# Altium PCB altium.pcbdoc
Units mil, origin at the board's own origin, x right, y up, seen from the top; angles counter-clockwise.
Board outline 2959 x 1843.93 mil, 2 copper layers (Top Layer, Bottom Layer); 9 components, 14 nets, 31 pads, 0 vias.
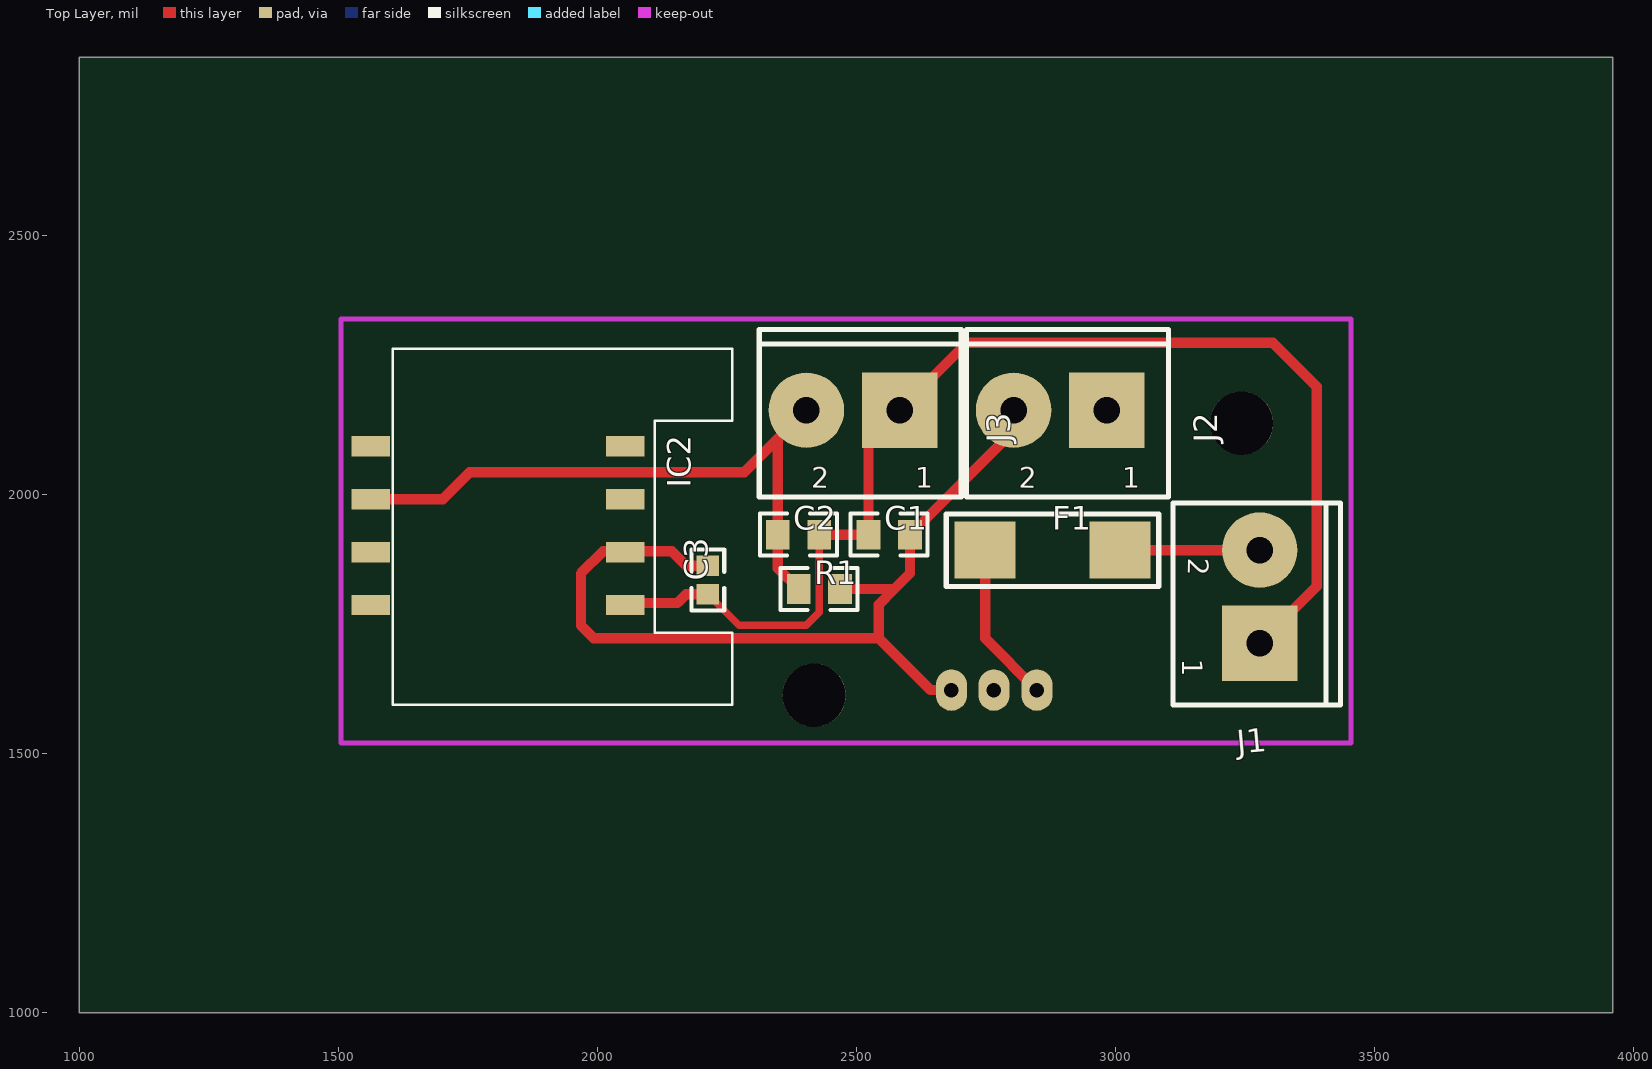
[diagram p0: Top Layer view]
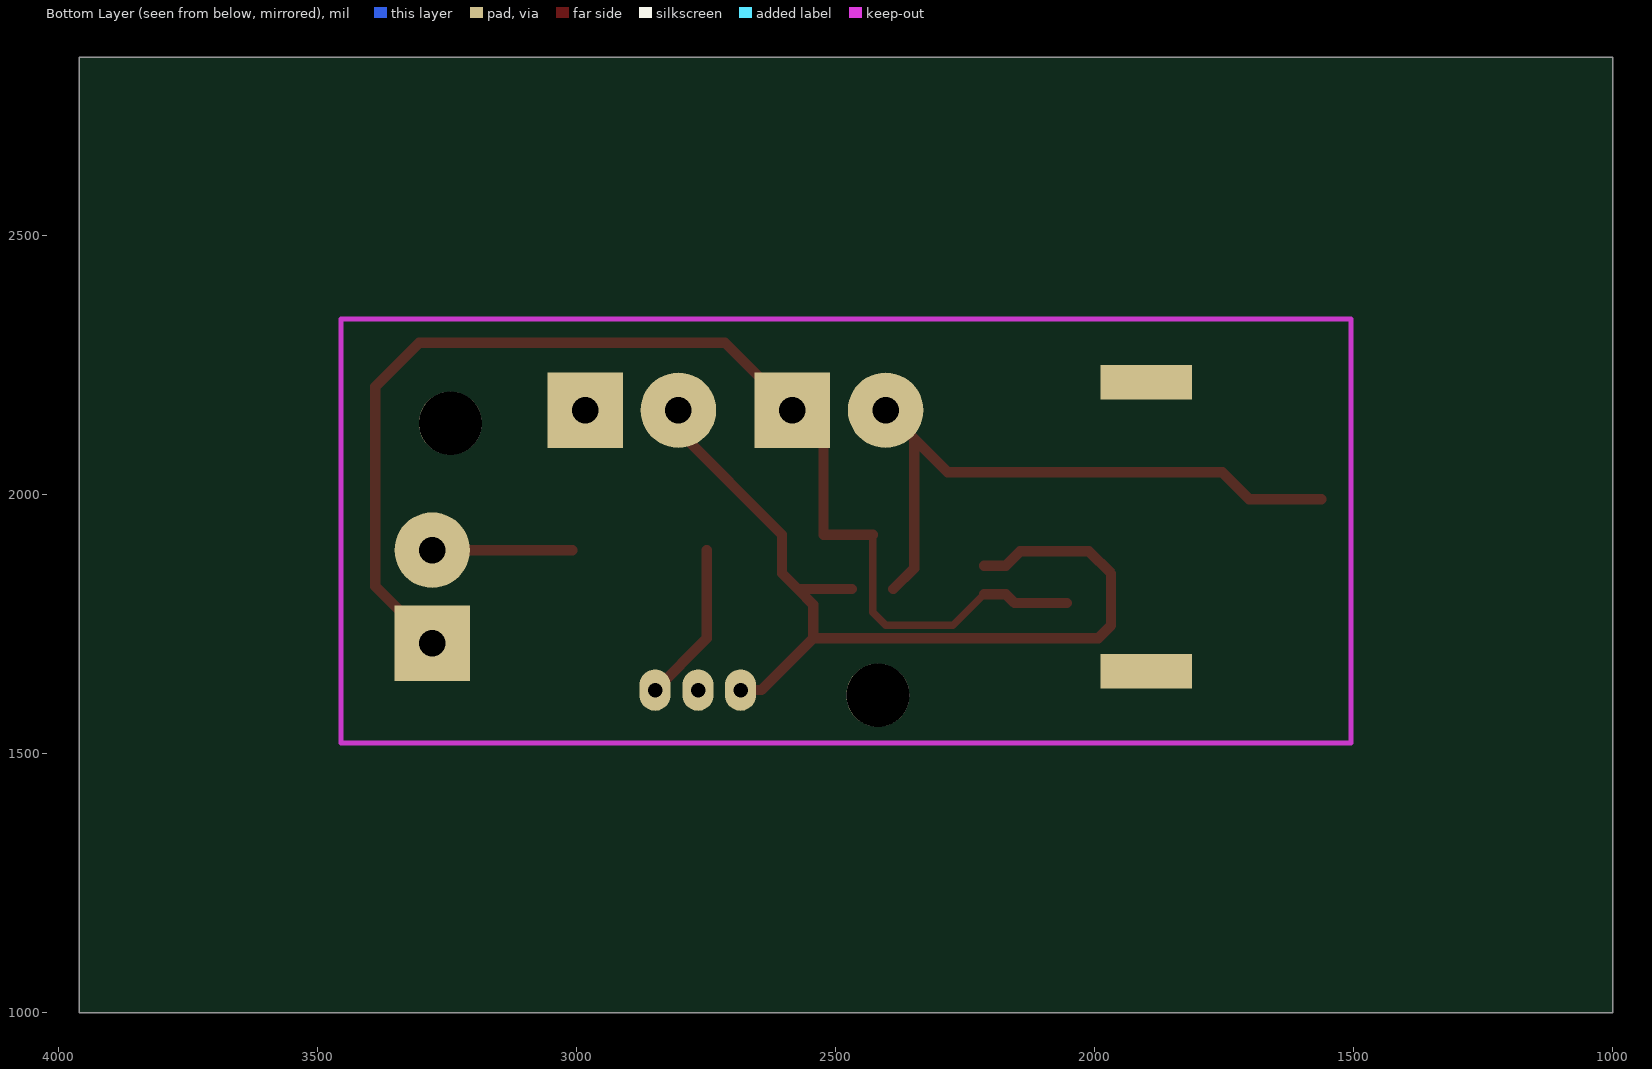
[diagram p1: Bottom Layer view, seen from below]

## Layer stack, top to bottom
Top Layer: signal copper (thickness not stored)
Dielectric: dielectric 12.6, FR-4, Dk 4.8
Bottom Layer: signal copper (thickness not stored)

## Board outline
3959,1000 1000,1000 1000,2843.93 3959,2843.93

## Components (designator, comment, footprint, x,y, rotation, side; value= is the part's Value field where it differs from the comment)
C1 "4.7nF" 0805 2563,1922.93 r0 top
C2 "4.7nF" 0805 2388,1922.93 r0 top
C3 "10nF" 0603 2213,1835.49 r90 top
F1 "NO" OMF_125 2508,2177.93 r0 top
IC2 "TR-72D" IQRF_KON-SIM-01 1858,1937.93 r270 top
J1 "KF127_2P_5.08" KF127_2P_5.08 3288,1782.93 r180 top
J2 "KF127_2P_5.08" KF127_2P_5.08 2913,2172.93 r270 top
J3 "KF127_2P_5.08" KF127_2P_5.08 2513,2172.93 r270 top
R1 "1K" 0805 2428,1817.93 r0 top

## Footprints (in the part's own frame and the unit in brackets; to place one, negate y for a bottom-side part, rotate by r counter-clockwise, add the part's x,y. Pads: shape width x height; smd on the part's side, far side on the other; paste and mask are expansions set on the pad)
0603 [mm]
  rect 1x1.1 smd: 1(-0.7,0) 2(0.7,0)
  silkscreen extent -1.5,-0.8 1.5,0.8
0805 [mm]
  rect 1.16x1.45 smd: 1(-1.016,0) 2(1.016,0)
  silkscreen extent -1.9,-1.03 1.87,1.04
IQRF_KON-SIM-01 [mm]
  rect 1x1.9 smd: 1(-3.951,4.97) 2(-1.35,4.97) 3(1.241,4.97) 4(3.832,4.97) 5(-3.951,-7.509) 6(-1.35,-7.509) 7(1.241,-7.509) 8(3.832,-7.509)
  rect 1.7x4.5 smd far side: 9(-7.08,1.07) 9(7.079,1.07)
  silkscreen extent -8.72,-6.43 8.72,10.22
KF127_2P_5.08 [mil]
  rect 145.67x145.67 hole 51.18: 1(10,70)
  round 145.67 hole 51.18: 2(10,-110)
  silkscreen extent -146,-201 177,189
OMF_125 [mm]
  rect 3x2.8 smd: 1(6.096,-7.239) 2(12.7,-7.239)
  silkscreen extent 4.19,-9.02 14.6,-5.46

## Free pads (board coordinates)
  oval 60x80 hole 28: 3(2683,1622.93) 3(2765,1622.93) 3(2848,1622.93)
  round 122 hole 122 unplated: ""(2418,1612.93) ""(3243,2137.93)

## Nets (pads, with @x,y where several pads share a name; then routed paths per layer and width w, separated by ;. In a path a pad name is that pad's centre, name@x,y a point inside that pad or via, vN(x,y) a via of type N, cw(c..) or ccw(c..) an arc to the next point about the centre after c; other vN are vias at no path point)
0: pad.3@2765,1622.93
+5V: C1.2 C3.2 IC2.3 J2.2 pad.3@2683,1622.93 R1.2 | length 1793.9
  Top Layer w20: C3.2 2171.3,1863.03 2143.3,1891.04 2053.7,1891.04 2011.1,1891.03 1968,1847.93 1968,1747.93 1993,1722.93 2543,1722.93 ; R1.2 2573,1817.93 ; pad.3@2683,1622.93 2643,1622.93 2543,1722.93 ; J2.2 2803,2122.93 C1.2 2603,1847.93 2573,1817.93 ; 2543,1722.93 2543,1787.93 2573,1817.93
C1/BTN1/LEFT: IC2.1
C2/BTN2/RIGHT: IC2.2
C7/STROBE: IC2.7
C8/CLK: IC2.8
F1_1: F1.1 pad.3@2848,1622.93 | length 311.4
  Top Layer w20: F1.1 2748,1722.93 pad.3@2848,1622.93
F1_2: F1.2 J1.2 | length 270
  Top Layer w20: F1.2 J1.2
GND: C1.1 C2.2 C3.1 IC2.4 J1.1 J3.1 | length 2361
  Top Layer w14: C3.1 2273,1747.93 2403,1747.93 2428,1772.93 C2.2
  Top Layer w20: IC2.4@2053.7,1791.04 2154.4,1791.04 2171.3,1807.93 C3.1 ; C2.2 C1.1 2523,2102.93 J3.1 2603,2182.93 2713,2292.93 3303,2292.93 3388,2207.93 3388,1822.93 J1.1
R2_1: IC2.5
S$22: 
S$67: 
S$69: 
SIG: C2.1 IC2.6 J3.2 R1.1 | length 1218.3
  Top Layer w20: IC2.6 1701.14,1991.07 1753,2042.93 2283,2042.93 J3.2 ; 2347.85,2107.79 2347.85,1923.08 C2.1 2348,1857.93 R1.1
pads on no net: IC2.9 J2.1

## Text inside footprints (layer, text, board x,y; h text height)
J1: Top Overlay "1" at 3128.32,1682.93 h39.37 r270; Top Overlay "2" at 3139.82,1878.18 h39.37 r269
J2: Top Overlay "1" at 3013,2013.25 h39.37; Top Overlay "2" at 2812.66,2013.25 h39.37 r359
J3: Top Overlay "1" at 2613,2013.25 h39.37; Top Overlay "2" at 2412.66,2013.25 h39.37 r359